# EAGLE board MacroMicro v38 (EAGLE 9.7.0)
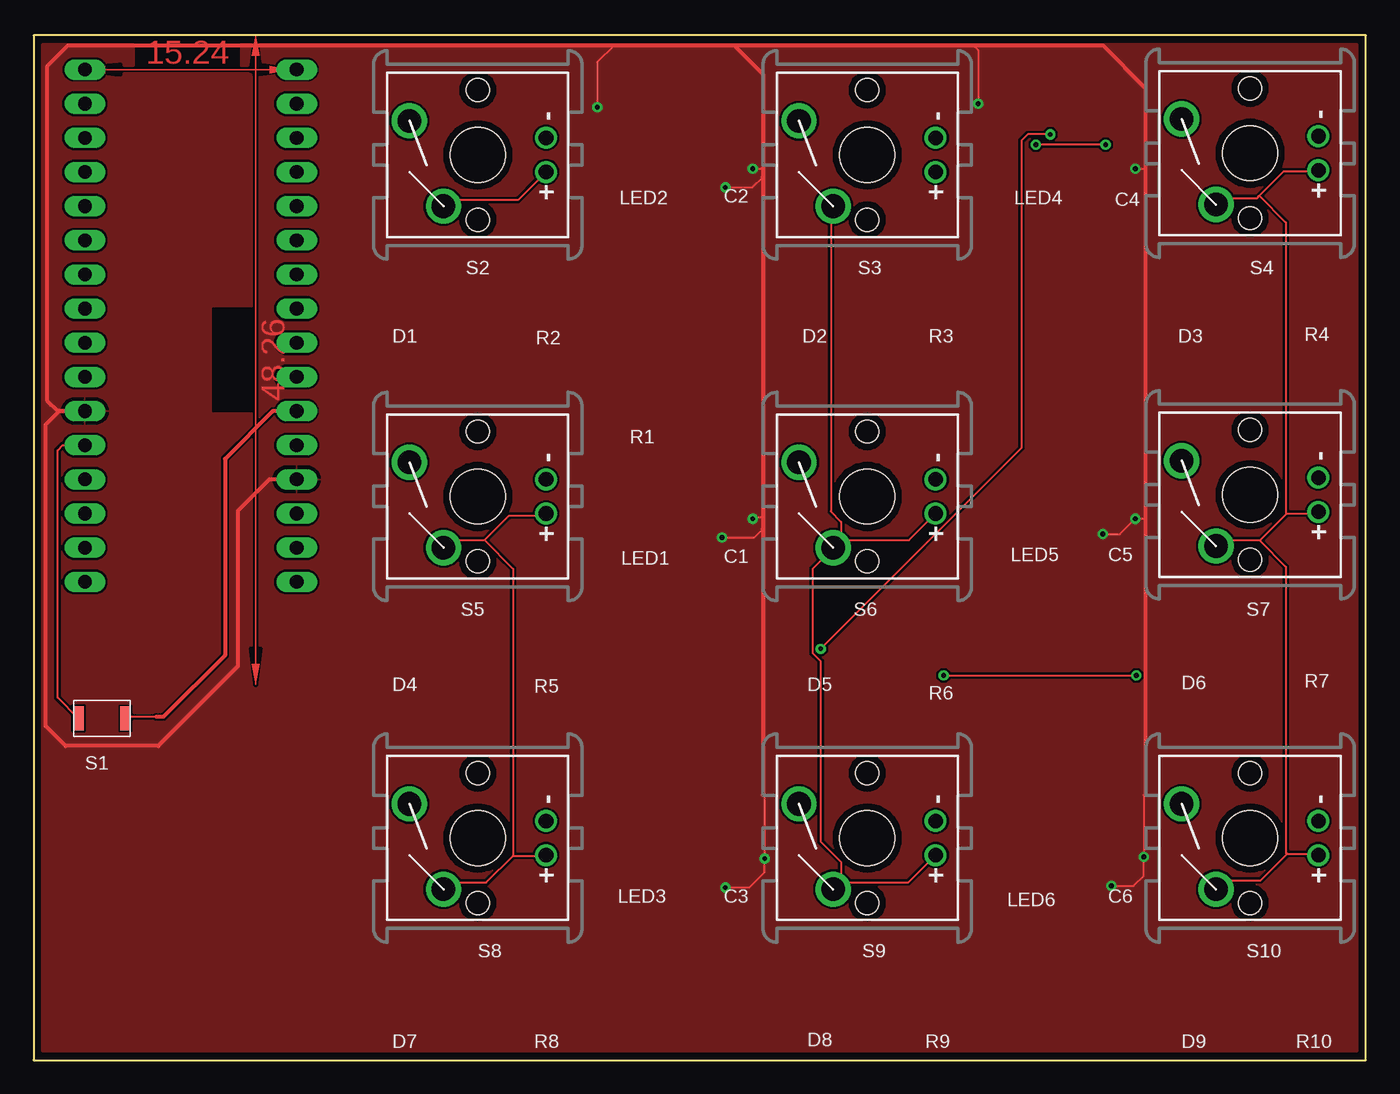
[diagram p0: board, top side]
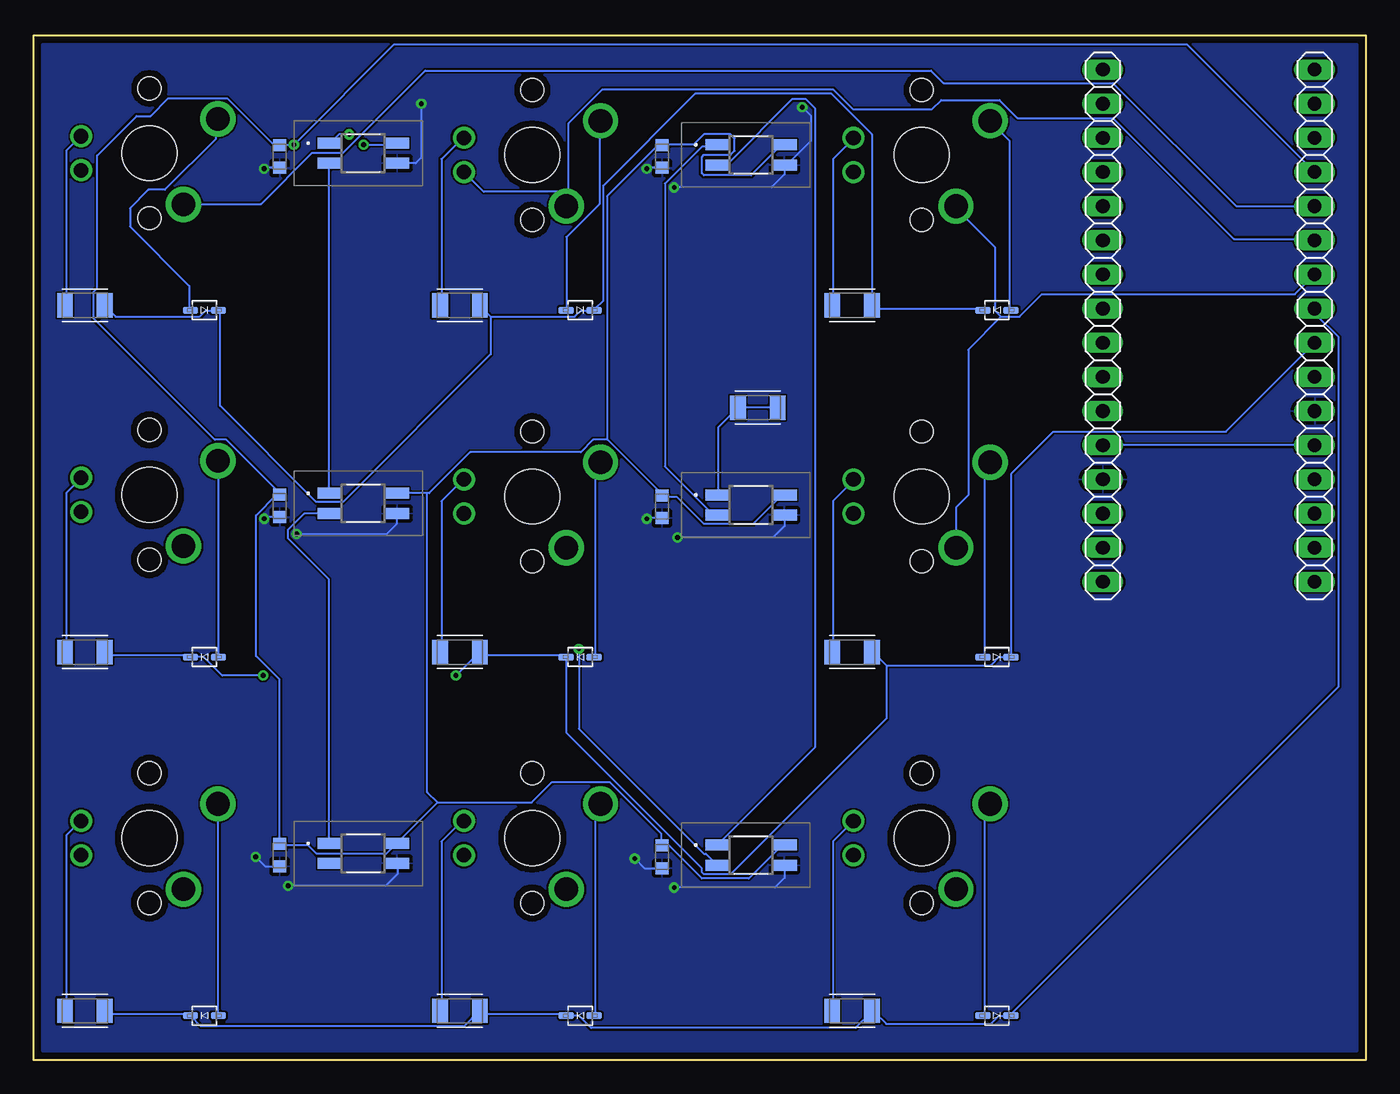
[diagram p1: board, bottom side, seen from below]

Size 99.06 x 76.2 mm. Coordinates in mm from the lower left corner, seen from the top.
Outline: 99.06,76.2 0,76.2 0,0 99.06,0 99.06,76.2
Copper layers (1*16): Top 0.035mm / dielectric 1.5mm / Bottom 0.035mm
Design rules "default *": minimum track width 6mil, minimum drill 0.35mm, track to track 6mil, track to pad 6mil, pad to pad 6mil, via to via 6mil, smd to smd 6mil, copper to edge 20mil, drill to drill 6mil, minimum pad ring 10mil, minimum via ring 8mil, stop-mask expansion 4mil, vias tented up to drill 0mil, thermal gap 10mil

## Footprints (pad centres in the part's own frame; a part is rotated, then mirrored left to right if it is on the bottom)
CAPC1608X80N = smd 0.89 x 0.97: 1 -0.839,0; 2 0.839,0
SOD-323 = smd 1.14 x 0.52: A 1.04,0; C -1.04,0
1X16 = drill 1.016 long: 1 -19.05,0; 2 -16.51,0; 3 -13.97,0; 4 -11.43,0; 5 -8.89,0; 6 -6.35,0; 7 -3.81,0; 8 -1.27,0; 9 1.27,0; 10 3.81,0; 11 6.35,0; 12 8.89,0; 13 11.43,0; 14 13.97,0; 15 16.51,0; 16 19.05,0
SK6812MINIE = smd 1.8 x 0.82: 1 -2.5,0.75; 2 -2.5,-0.75; 3 2.5,-0.75; 4 2.5,0.75
RESC3216X70 = smd 1.165 x 1.815: 1 -1.475,0; 2 1.475,0
B3U-1000P(M) = smd 0.8 x 1.8: 1 -1.75,0; 2 1.75,0
CHERRY-MX-LED = drill 1.092: A -1.27,-5.08; K 1.27,-5.08 | drill 1.753: S1 -3.81,2.54; S2 2.54,5.08 | hole 4.089: 0,0 | hole 1.707: -4.826,0; 4.826,0

## Placement (x,y rotation side)
C1  0.1uf  [CAPC1608X80N]  52.32,67.18 270 bottom
C2  0.1uf  [CAPC1608X80N]  52.32,41.15 270 bottom
C3  0.1uf  [CAPC1608X80N]  52.32,15.11 270 bottom
C4  0.1uf  [CAPC1608X80N]  80.77,67.18 270 bottom
C5  0.1uf  [CAPC1608X80N]  80.77,41.21 270 bottom
C6  0.1uf  [CAPC1608X80N]  80.77,15.24 270 bottom
D1  1N4148WS  [SOD-323]  27.43,55.76 0 bottom
D2  1N4148WS  [SOD-323]  58.42,55.76 180 bottom
D3  1N4148WS  [SOD-323]  86.36,55.76 180 bottom
D4  1N4148WS  [SOD-323]  27.43,29.98 180 bottom
D5  1N4148WS  [SOD-323]  58.42,29.98 0 bottom
D6  1N4148WS  [SOD-323]  86.36,29.98 0 bottom
D7  1N4148WS  [SOD-323]  27.43,3.31 180 bottom
D8  1N4148WS  [SOD-323]  58.42,3.31 0 bottom
D9  1N4148WS  [SOD-323]  86.36,3.31 0 bottom
JP1  PINHD-1X16  [1X16]  19.56,54.61 90 bottom
JP2  PINHD-1X16  [1X16]  3.81,54.61 90 bottom
LED1  SK6812MINI-E  [SK6812MINIE]  45.72,41.27 0 bottom
LED2  SK6812MINI-E  [SK6812MINIE]  45.72,67.31 0 bottom
LED3  SK6812MINI-E  [SK6812MINIE]  45.72,15.24 0 bottom
LED4  SK6812MINI-E  [SK6812MINIE]  74.55,67.44 0 bottom
LED5  SK6812MINI-E  [SK6812MINIE]  74.55,41.4 0 bottom
LED6  SK6812MINI-E  [SK6812MINIE]  74.55,15.37 0 bottom
R1  500ohm  [RESC3216X70]  45.21,48.51 180 bottom
R2  330ohm  [RESC3216X70]  38.2,56.12 180 bottom
R3  330ohm  [RESC3216X70]  67.36,56.12 180 bottom
R4  330ohm  [RESC3216X70]  95.25,56.12 180 bottom
R5  330ohm  [RESC3216X70]  38.2,30.34 180 bottom
R6  330ohm  [RESC3216X70]  67.36,30.34 180 bottom
R7  330ohm  [RESC3216X70]  95.25,30.34 180 bottom
R8  330ohm  [RESC3216X70]  38.2,3.67 180 bottom
R9  330ohm  [RESC3216X70]  67.36,3.67 180 bottom
R10  330ohm  [RESC3216X70]  95.25,3.67 180 bottom
S1  B3U-1000P(M)  [B3U-1000P(M)]  5.08,25.4 0 top
S2  MOMENTARY-SWITCH-SPST-LED-PTH-CHERRY  [CHERRY-MX-LED]  33.02,67.31 90 top
S3  MOMENTARY-SWITCH-SPST-LED-PTH-CHERRY  [CHERRY-MX-LED]  61.99,67.31 90 top
S4  MOMENTARY-SWITCH-SPST-LED-PTH-CHERRY  [CHERRY-MX-LED]  90.45,67.44 90 top
S5  MOMENTARY-SWITCH-SPST-LED-PTH-CHERRY  [CHERRY-MX-LED]  33.02,41.91 90 top
S6  MOMENTARY-SWITCH-SPST-LED-PTH-CHERRY  [CHERRY-MX-LED]  61.99,41.91 90 top
S7  MOMENTARY-SWITCH-SPST-LED-PTH-CHERRY  [CHERRY-MX-LED]  90.45,42.04 90 top
S8  MOMENTARY-SWITCH-SPST-LED-PTH-CHERRY  [CHERRY-MX-LED]  33.02,16.51 90 top
S9  MOMENTARY-SWITCH-SPST-LED-PTH-CHERRY  [CHERRY-MX-LED]  61.99,16.51 90 top
S10  MOMENTARY-SWITCH-SPST-LED-PTH-CHERRY  [CHERRY-MX-LED]  90.45,16.51 90 top

## Library data of the parts
C1-C6 = C0,1uf/100nf; DESCRIPTION: 0.1µF ±10% 50V Ceramic Capacitor X7R (2R1) 0603 (1608 Metric); DIGI-KEY_PART_NUMBER: 1608-1306-1-ND; MF: Knowles Syfer; MP: 0603Y0500104KET; PACKAGE: 1608 Knowles Syfer; PURCHASE-URL: https://pricing.snapeda.com/search/part/0603Y0500104KET/?ref=eda
D1-D9 = Diodes; CREATED_BY: PCBLayout.com; DIGIKEY_PART_NUMBER: 1N4148WSFSTR-ND; MANUFACTURER: Diodes Incorporated; MPN: 1N4148WS; PACKAGE: SOD-323
JP1 JP2 = Connector; CATEGORY: CONNECTOR; SUB-CATEGORY: PIN-HEADER
LED1-LED6 = LED-SK6812MINI-E
R1-R10 = Resistor; CATEGORY: Resistor; SUB-CATEGORY: Fixed
S1 = Switch; CATEGORY: SWITCH; DESCRIPTION: Ultra-small Surface-mounting Tactile Switches with High Contact Reliability; MANUFACTURER: OMRON; OPERATING_TEMPERATURE: -25°C to +70°C at 60%RH max; PART_STATUS: ACTIVE; ROHS_COMPLIANCE: RoHS Compliant; SERIES: B3U; TYPE: Tactile
S2-S10 = SparkFun-Switches; SF_ID: COM-13834

## Nets
0/RX: JP2.4
1/TX: JP2.3
2/SDA: JP2.7
2/SDA2: D1.C D2.C D3.C R2.1 R3.1 R4.1
3.3V: JP1.14
3/PWM/SCL: D4.C D5.C D6.C JP2.8 R5.1 R6.1 R7.1
4/A6: D7.C D8.C D9.C JP2.9 R8.1 R9.1 R10.1
5/PWM: JP2.10 S2.A S2.S1 S5.A S5.S1 S8.A S8.S1
6/PWM/A7: JP2.11 S3.A S3.S1 S6.A S6.S1 S9.A S9.S1
7: JP2.12 S4.A S4.S1 S7.A S7.S1 S10.A S10.S1
8/A8: C1.1 C2.1 C3.1 C4.1 C5.1 C6.1 JP2.13 LED1.4 LED2.4 LED3.4 LED4.4 LED5.4 LED6.4
9/PWM/A9: JP2.14
10/PWM/A10: JP2.15
11/PWM: JP2.16
12/A11: JP1.16
13/PWM: JP1.15
+5V: JP1.6 S1.2
A0: JP1.12
A1: JP1.11
A2: JP1.10
A3: JP1.9
A4: JP1.8
A5: JP1.7
AREF: JP1.13
DIN: LED1.1 R1.1 R1.2
GND: C1.2 C2.2 C3.2 C4.2 C5.2 C6.2 JP1.4 JP2.6 LED1.3 LED2.3 LED3.3 LED4.3 LED5.3 LED6.3
MISO: JP1.2
MOSI: JP2.1
N$1: D1.A S2.S2
N$2: D2.A S3.S2
N$4: R3.2 S3.K
N$5: D3.A S4.S2
N$6: R4.2 S4.K
N$7: D4.A S5.S2
N$8: R5.2 S5.K
N$9: D5.A S6.S2
N$10: LED1.2 LED2.1
N$11: R2.2 S2.K
N$12: R6.2 S6.K
N$13: LED2.2 LED3.1
N$14: D6.A S7.S2
N$15: R7.2 S7.K
N$16: LED3.2 LED4.1
N$17: D7.A S8.S2
N$18: R8.2 S8.K
N$19: D8.A S9.S2
N$20: R9.2 S9.K
N$21: D9.A S10.S2
N$22: R10.2 S10.K
N$23: LED4.2 LED5.1
N$24: LED5.2 LED6.1
RESET: JP1.5 JP2.5 S1.1
RX_LED/SS: JP2.2
SCK: JP1.1
VIN: JP1.3

## Tracks (layer width: path | path; a pad name or v marks a point on that pad's centre or on a via)
2/SDA2
  Bottom 0.152: R4.1 93.73,56.03 92.96,55.27 86.72,55.27 86.26,55.73 85.34,55.73 D3.C 85.19,55.64 85.19,48.66 78.04,41.51 76.05,41.51 65.08,52.49 65.08,55.27 | D1.C 28.5,55.88 36.42,55.88 36.58,56.03 R2.1 36.73,56.19 36.73,68.83 39.78,71.88 49.84,71.88 56.69,65.02 56.69,56.49 57.3,55.88 D2.C 57.46,55.73 58.37,55.73 58.83,55.27 65.08,55.27 | 65.08,55.27 65.84,56.03 R3.1
3/PWM/SCL  (via drill 0.35)
  Top 0.152: v67.67,28.6 v81.99,28.6
  Bottom 0.152: R7.1 93.73,30.28 93.57,30.12 87.48,30.12 D6.C 87.33,29.97 86.41,29.97 85.04,28.6 v81.99,28.6 | v67.67,28.6 65.99,30.28 R6.1 65.84,30.28 65.68,30.12 59.59,30.12 D5.C 59.44,29.97 59.44,24.33 49.38,14.27 49.38,13.97 49.23,13.82 47.24,13.82 35.66,25.4 35.66,29.36 | 35.66,29.36 27.89,29.36 27.28,29.97 26.52,29.97 D4.C 26.36,30 26.36,43.62 23.25,46.74 10.41,46.74 JP2.8 | 35.66,29.36 36.58,30.28 R5.1
4/A6
  Bottom 0.152: JP2.9 3.71,55.88 3.71,55.42 2.03,53.75 2.03,27.79 26.36,3.45 D7.C 26.52,3.3 27.28,3.3 27.89,2.69 35.66,2.69 36.58,3.61 R8.1 36.73,3.61 37.95,2.39 57.61,2.39 58.52,3.3 59.44,3.3 D8.C 59.61,3.45 65.67,3.45 R9.1 65.93,3.67 67.07,2.53 86.62,2.53 D9.C 87.55,3.45 93.56,3.45 R10.1
5/PWM
  Top 0.152: 35.66,15.19 35.64,15.19 33.66,13.21 30.99,13.21 S8.S1 | 35.66,15.19 38.1,15.19 S8.A | 33.53,38.66 35.36,40.49 37.95,40.49 S5.A | 33.53,38.66 30.94,38.66 30.48,38.2 S5.S1 | 35.66,15.19 35.66,36.52 33.53,38.66 | S2.S1 30.94,63.96 36.02,63.96 S2.A
  Bottom 0.152: 27.13,55.27 25.76,55.27 24.08,56.95 5.28,56.95 JP2.10 | 27.13,55.27 27.58,55.73 27.58,60.45 30.48,63.35 S2.S1 | S5.S1 30.48,41.1 29.57,42.01 29.57,52.83 27.13,55.27
6/PWM/A7
  Top 0.152: 60.05,13.21 59.59,12.75 S9.S1 60.05,13.21 | 60.05,38.66 59.59,38.2 S6.S1 | 60.05,13.21 60.05,14.73 58.52,16.26 58.52,29.67 57.92,30.27 57.92,36.53 59.45,38.06 S6.S1 | 60.05,38.66 60.05,40.03 59.28,40.79 59.28,63.19 59.44,63.35 S3.S1 | 60.05,38.66 S6.S1 | 60.05,13.21 65.04,13.21 S9.A | 60.05,38.66 65.09,38.66 S6.A
  Bottom 0.152: 59.28,64.57 59.28,63.65 59.44,63.5 S3.S1 59.28,64.57 | 59.28,64.57 65.6,64.57 S3.A | JP2.11 3.91,61.06 9.8,61.06 18.8,70.05 25.91,70.05 27.25,71.39 31.58,71.39 32.27,70.7 38.14,70.7 39.62,72.19 56.75,72.19 59.28,69.66 59.28,64.57
7
  Top 0.152: 93.22,15.34 93.12,15.34 93.12,36.68 91.17,38.62 91.21,38.66 | 93.22,15.34 95.02,15.34 S10.A | 93.22,15.34 91.24,13.36 88.57,13.36 S10.S1 | 93.19,40.64 93.12,40.64 93.12,62.28 91.13,64.26 | 93.19,40.64 95.4,40.64 S7.A | 91.21,38.66 93.19,40.64 | S7.S1 87.94,38.35 88.24,38.66 91.21,38.66 | 91.13,64.26 90.98,64.11 88.39,64.11 87.94,63.65 S4.S1 | 91.13,64.26 92.96,66.09 95.45,66.09 S4.A
  Bottom 0.152: JP2.12 9.65,63.5 18.8,72.64 31.39,72.64 32.32,73.57 69.94,73.57 76.05,67.46 78.33,67.46 82.14,63.65 87.88,63.65 S4.S1
8/A8  (via drill 0.35)
  Top 0.152: v79.7,68.07 v74.52,68.07
  Bottom 0.152: LED2.4 43.28,67.92 43.59,67.92 45.72,65.79 49.23,65.79 49.38,65.94 49.38,67.16 49.23,67.31 47.24,67.31 46.94,67.61 46.94,68.53 47.24,68.83 49.23,68.83 49.99,68.07 52.27,68.07 C1.1 52.43,67.92 52.73,67.92 56.39,64.26 56.39,46.13 | LED1.4 43.28,42.16 45.57,39.88 49.23,39.88 51.21,41.86 52.27,41.86 C2.1 52.27,42.01 56.39,46.13 | 69.8,42.16 69.65,42.16 66.6,45.21 58.37,45.21 57.46,46.13 56.39,46.13 | 69.8,42.16 71.93,42.16 LED5.4 | LED3.4 43.28,16.1 45.87,13.51 49.38,13.51 51.82,15.95 52.27,15.95 C3.1 52.43,16.1 52.43,16.87 56.24,20.68 60.5,20.68 62.03,19.15 69.04,19.15 | 80.77,68.07 81.23,68.07 84.68,71.52 89.06,71.52 90.37,70.21 91.4,70.21 94.34,67.27 94.34,57.4 94.59,57.15 94.59,55.12 85.59,46.13 84.74,46.13 80.77,42.16 C5.1 80.81,42.01 81.02,42.01 82.52,40.51 82.52,30.05 80.77,28.3 C6.1 80.77,15.95 78.64,15.95 78.03,15.34 72.85,15.34 72.08,16.1 LED6.4 71.93,16.26 69.04,19.15 | v74.52,68.07 72.08,68.07 LED4.4 | 80.77,68.07 v79.7,68.07 72.24,75.54 13.31,75.54 JP2.13 | 80.77,68.07 C4.1 | 69.8,42.16 69.8,19.91 69.04,19.15
+5V
  Top 0.152: 9.14,25.53 6.96,25.53 S1.2
  Top 0.305: JP1.6 17.78,48.26 14.22,44.7 14.22,30.1 9.65,25.53 9.14,25.53
DIN
  Bottom 0.152: LED1.1 48.16,42.16 48.16,47.04 46.79,48.41 R1.2 46.63,48.56 43.74,48.56 R1.1
GND  (via drill 0.35)
  Top 0.152: 69.85,75.46 70.23,75.08 v70.23,71.12 | 43.18,75.46 41.91,74.19 v41.91,70.87 | 82.68,19.81 82.55,19.68 v82.55,15.11 82.55,13.72 81.79,12.95 v80.14,12.95 | v81.91,66.29 82.68,66.29 | 82.68,40.26 v81.91,40.26 80.77,39.12 v79.5,39.12 | 54.23,19.68 54.36,19.56 v54.36,14.99 54.36,13.97 53.21,12.83 v51.44,12.83 | v51.18,38.86 53.59,38.86 54.23,39.5 | v53.47,40.26 53.59,40.39 54.23,40.39 | v51.44,64.9 53.47,64.9 54.23,65.66 | v53.47,66.29 54.23,66.29
  Top 0.305: 52.07,75.46 43.18,75.46 2.56,75.46 1.02,73.91 1.02,49.02 1.78,48.26 JP2.6 1.91,48.26 0.89,47.24 0.89,24.84 2.37,23.36 9.27,23.36 15.19,29.27 15.19,40.84 17.53,43.18 JP1.4 | 52.07,75.46 69.85,75.46 79.5,75.46 82.68,72.29 82.68,66.29 82.68,40.26 82.68,19.81 | 52.07,75.46 54.23,73.3 54.23,66.29 54.23,65.66 54.23,40.39 54.23,39.5 54.23,19.68
  Bottom 0.152: v70.23,71.12 70.23,67.1 70.65,66.69 LED4.3 | v41.91,70.87 41.28,70.23 41.28,68.37 43.09,66.56 LED2.3 43.22,65.87 44.2,64.9 v51.44,64.9 | v82.55,15.11 81.84,14.4 C6.2 | C4.2 81.86,66.34 v81.91,66.29 | C5.2 81.8,40.37 v81.91,40.26 | LED5.3 72.05,39.89 72.82,39.12 v79.5,39.12 | LED6.3 72.01,14.58 72.01,13.84 72.9,12.95 v80.14,12.95 | v54.36,14.99 53.64,14.27 C3.2 | LED3.3 43.22,13.55 43.94,12.83 v51.44,12.83 | LED1.3 43.22,39.71 44.07,38.86 v51.18,38.86 | C2.2 53.42,40.31 v53.47,40.26 | C1.2 53.42,66.34 v53.47,66.29
  pour Top: 0,76.2 99.06,76.2 99.06,0 0,0
  pour Bottom: 99.06,76.2 99.06,0 0,0 0,76.2
N$1
  Bottom 0.152: D1.A 26.52,55.88 26.52,68.38 27.89,69.75 S2.S2
N$2
  Bottom 0.152: D2.A 59.44,55.88 59.44,61.21 57,63.65 57,69.75 S3.S2
N$4
  Bottom 0.152: R3.2 68.73,56.19 68.73,67 67.21,68.53 S3.K
N$5
  Bottom 0.152: D3.A 87.48,55.88 87.48,57.56 91.9,61.98 91.9,63.35 90.53,64.72 89.31,64.72 85.5,68.53 85.5,69.9 S4.S2
N$6
  Bottom 0.152: R4.2 96.62,56.19 96.62,67.61 95.55,68.68 S4.K
N$7
  Bottom 0.152: D4.A 28.35,30.12 28.35,43.99 28.04,44.3 S5.S2
N$8
  Bottom 0.152: R5.2 39.62,30.43 39.62,41.55 38.1,43.08 S5.K
N$9
  Bottom 0.152: D5.A 57.3,30.12 57.3,43.99 57,44.3 S6.S2
N$10
  Bottom 0.152: LED1.2 48.31,40.64 48.62,40.64 52.12,44.14 52.12,65.18 49.38,67.92 48.31,67.92 LED2.1
N$11
  Bottom 0.152: R2.2 39.62,56.19 39.62,67 38.1,68.53 S2.K
N$12
  Bottom 0.152: R6.2 68.73,30.43 68.73,41.55 67.21,43.08 S6.K
N$13
  Bottom 0.152: LED2.2 48.08,66.7 47.4,66.7 42.62,71.47 41.66,71.47 40.97,70.78 40.97,23.24 LED3.1
N$14
  Bottom 0.152: D6.A 85.34,30.12 85.34,44.45 S7.S2
N$15
  Bottom 0.152: R7.2 96.62,30.43 96.62,42.16 95.55,43.23 S7.K
N$16  (via drill 0.35)
  Top 0.152: v58.52,30.58 73.46,45.52 73.46,68.38 73.91,68.83 v75.59,68.83
  Bottom 0.152: v58.52,30.58 58.52,24.64 49.23,15.34 49.07,15.34 48.31,14.58 LED3.2 | v75.59,68.83 76.35,68.83 76.96,68.22 LED4.1
N$17
  Bottom 0.152: D7.A 28.35,3.45 28.35,18.69 28.04,19 S8.S2
N$18
  Bottom 0.152: S8.K 39.62,16.26 39.62,3.76 R8.2
N$19
  Bottom 0.152: D8.A 57.3,3.45 57.3,18.69 57,19 S9.S2
N$20
  Bottom 0.152: R9.2 68.73,3.76 68.73,16.26 67.21,17.78 S9.K
N$21
  Bottom 0.152: D9.A 85.34,3.45 85.34,19.02 S10.S2
N$22
  Bottom 0.152: R10.2 96.62,3.76 96.62,16.71 95.56,17.77 S10.K
N$23
  Bottom 0.152: LED5.1 77.11,42.16 77.11,66.55 LED4.2
N$24
  Bottom 0.152: LED6.1 77.11,16.26 77.11,35.76 80.16,38.81 80.16,39.42 78.94,40.64 77.11,40.64 LED5.2
RESET
  Top 0.152: S1.1 1.78,26.95 1.78,45.34 2.16,45.72 JP2.5
  Bottom 0.152: JP2.5 JP1.5
(copper drawn outside any net)
  shapes: Top area x2

## Text on the board
tNames: LED2 | C2 | LED4 | C4 | S2 | S3 | S4 | D1 | R2 | D2 | R3 | D3 | R4 | R1 | LED1 | C1 | LED5 | C5 | S5 | S6 | S7 | R7 | D4 | R5 | D5 | R6 | D6 | S1 | LED3 | C3 | C6 | LED6 | S8 | S9 | S10 | D7 | R8 | D8 | R9 | D9 | R10